# EAGLE board brushless (EAGLE 4.16)
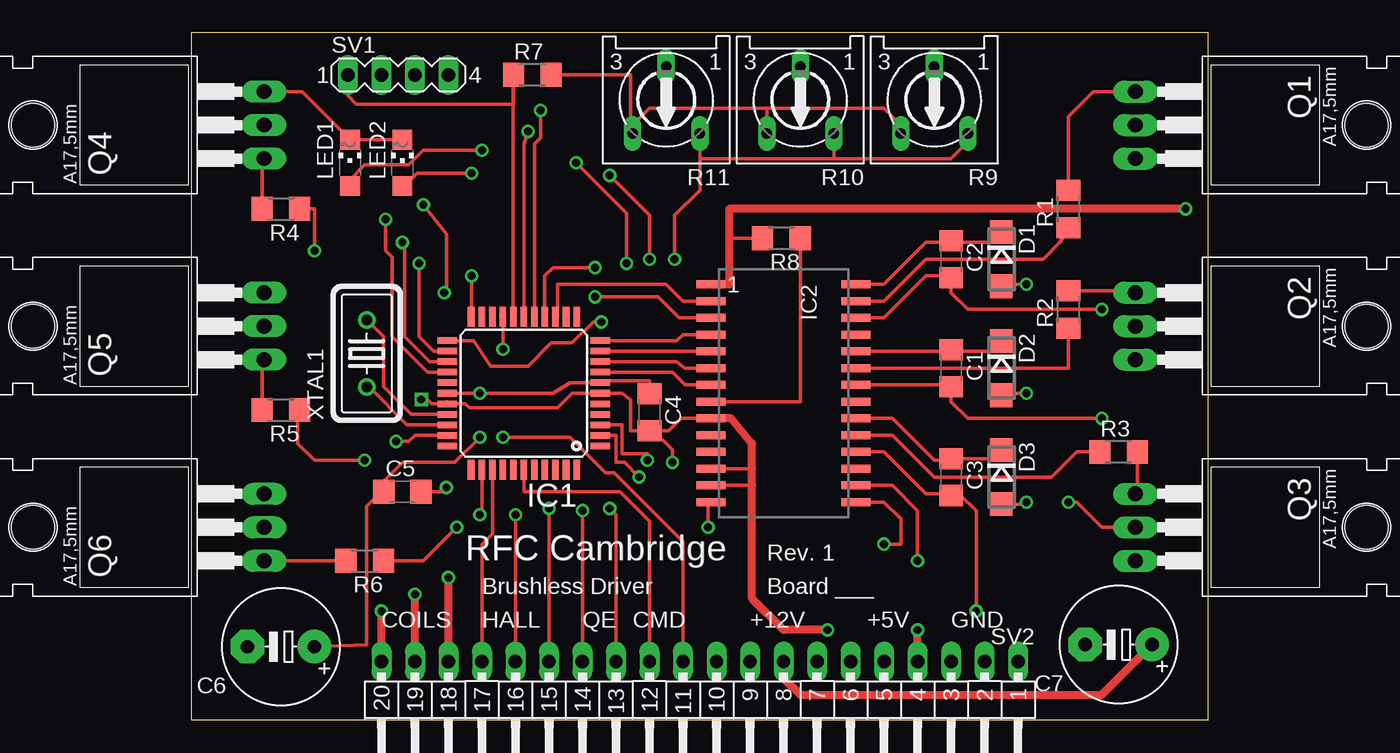
[diagram p0: board, top side]
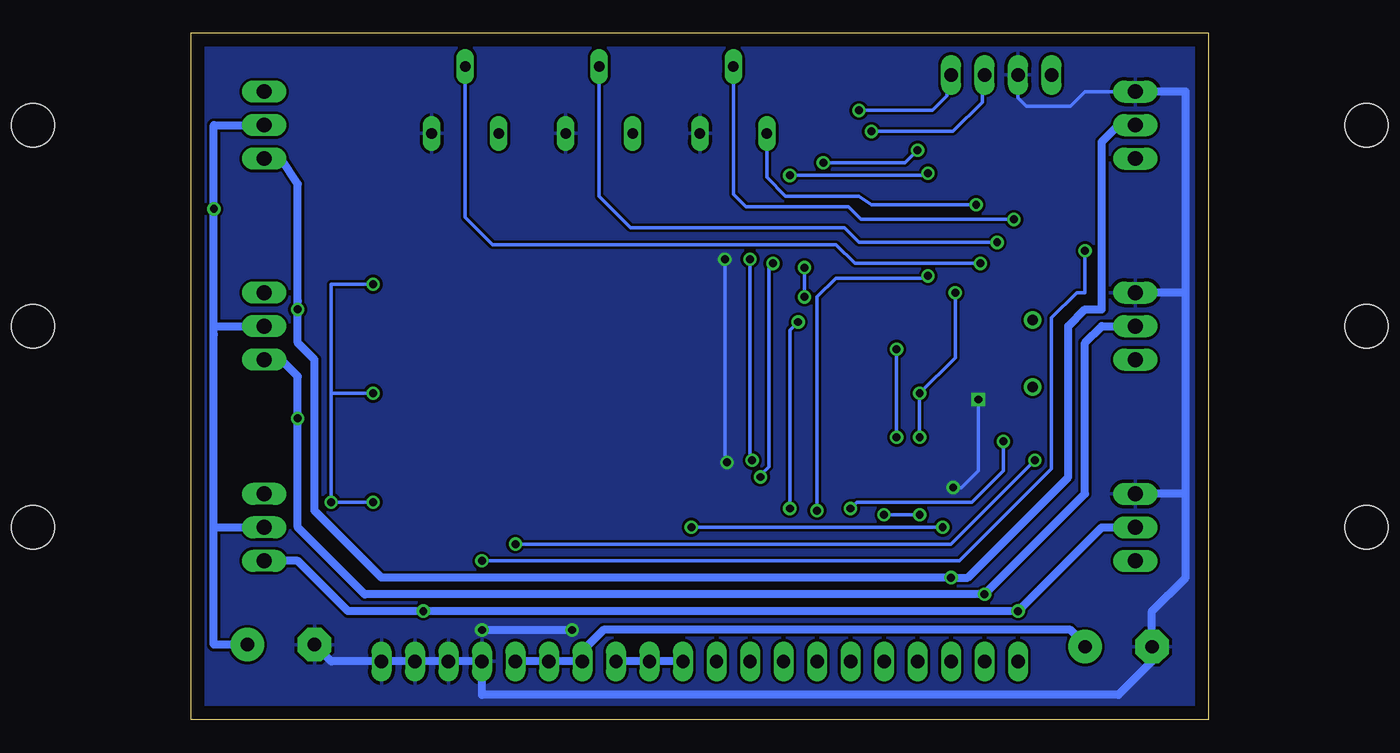
[diagram p1: board, bottom side, seen from below]

Size 77.14 x 52.06 mm. Coordinates in mm from the lower left corner, seen from the top.
Outline: 0,0 77.14,0 77.14,52.06 0,52.06 0,0
Copper layers (1*16): Top 0.035mm / dielectric 1.5mm / Bottom 0.035mm
Design rules "default": minimum track width 10mil, minimum drill 24mil, track to track 8mil, track to pad 8mil, pad to pad 8mil, via to via 8mil, smd to smd 8mil, copper to edge 40mil, drill to drill 8mil, minimum pad ring 10mil, minimum via ring 8mil, stop-mask expansion 4mil, vias tented up to drill 0mil, thermal gap 10mil

## Footprints (pad centres in the part's own frame; a part is rotated, then mirrored left to right if it is on the bottom)
C1206 = smd 1.6 x 1.8: 1 -1.4,0; 2 1.4,0
E5-8,5 = drill 1.016 pad 2.54 round: + -2.54,0 | drill 1.016 pad 2.54 octagon: - 2.54,0
DO214AC = smd 1.8 x 1.7: A 2.05,0; C -2.05,0
TQFP44 = smd 1.5 x 0.5: 1 -5.8,4; 2 -5.8,3.2; 3 -5.8,2.4; 4 -5.8,1.6; 5 -5.8,0.8; 6 -5.8,0; 7 -5.8,-0.8; 8 -5.8,-1.6; 9 -5.8,-2.4; 10 -5.8,-3.2; 11 -5.8,-4; 23 5.8,-4; 24 5.8,-3.2; 25 5.8,-2.4; 26 5.8,-1.6; 27 5.8,-0.8; 28 5.8,0; 29 5.8,0.8; 30 5.8,1.6; 31 5.8,2.4; 32 5.8,3.2; 33 5.8,4 | smd 0.5 x 1.5: 12 -4,-5.8; 13 -3.2,-5.8; 14 -2.4,-5.8; 15 -1.6,-5.8; 16 -0.8,-5.8; 17 0,-5.8; 18 0.8,-5.8; 19 1.6,-5.8; 20 2.4,-5.8; 21 3.2,-5.8; 22 4,-5.8; 34 4,5.8; 35 3.2,5.8; 36 2.4,5.8; 37 1.6,5.8; 38 0.8,5.8; 39 0,5.8; 40 -0.8,5.8; 41 -1.6,5.8; 42 -2.4,5.8; 43 -3.2,5.8; 44 -4,5.8
SOP28 = smd 0.6 x 2.2: 1 -8.255,-5.5; 2 -6.985,-5.5; 3 -5.715,-5.5; 4 -4.445,-5.5; 5 -3.175,-5.5; 6 -1.905,-5.5; 7 -0.635,-5.5; 8 0.635,-5.5; 9 1.905,-5.5; 10 3.175,-5.5; 11 4.445,-5.5; 12 5.715,-5.5; 13 6.985,-5.5; 14 8.255,-5.5; 15 8.255,5.5; 16 6.985,5.5; 17 5.715,5.5; 18 4.445,5.5; 19 3.175,5.5; 20 1.905,5.5; 21 0.635,5.5; 22 -0.635,5.5; 23 -1.905,5.5; 24 -3.175,5.5; 25 -4.445,5.5; 26 -5.715,5.5; 27 -6.985,5.5; 28 -8.255,5.5
CHIPLED_1206 = smd 1.5 x 1.5: A 0,-1.75; C 0,1.75
TO220 = drill 1.118 long: 1 -2.54,-6.35; 2 0,-6.35; 3 2.54,-6.35 | hole 3.302: 0,11.176
R1206 = smd 1.6 x 1.803: 1 -1.422,0; 2 1.422,0
RS3 = drill 0.813 long: A -2.54,2.54; E 2.54,2.54; S 0,-2.54
MA04-1 = drill 1.016 long: 1 -3.81,0; 2 -1.27,0; 3 1.27,0; 4 3.81,0
MA20-1W = drill 1.016 long: 1 -24.13,0; 2 -21.59,0; 3 -19.05,0; 4 -16.51,0; 5 -13.97,0; 6 -11.43,0; 7 -8.89,0; 8 -6.35,0; 9 -3.81,0; 10 -1.27,0; 11 1.27,0; 12 3.81,0; 13 6.35,0; 14 8.89,0; 15 11.43,0; 16 13.97,0; 17 16.51,0; 18 19.05,0; 19 21.59,0; 20 24.13,0
HC18U-V = drill 0.813 round: 1 -2.54,0; 2 2.54,0

## Placement (x,y rotation side)
C1  [C1206]  57.62,26.66 270 top
C2  [C1206]  57.62,34.92 270 top
C3  [C1206]  57.62,18.41 270 top
C4  0.1uF  [C1206]  34.76,23.33 270 top
C5  0.1uF  [C1206]  16.03,17.3 0 top
C6  [E5-8,5]  6.82,5.55 180 top
C7  [E5-8,5]  70.32,5.71 180 top
D1  [DO214AC]  61.43,34.92 270 top
D2  [DO214AC]  61.43,26.66 270 top
D3  [DO214AC]  61.43,18.41 270 top
IC1  PIC18F4431S  [TQFP44]  25.23,24.76 180 top
IC2  [SOP28]  44.92,24.76 270 top
LED1  [CHIPLED_1206]  12.06,42.22 0 top
LED2  [CHIPLED_1206]  16.03,42.22 0 top
Q1  IRF510  [TO220]  77.94,45.08 270 top
Q2  IRF510  [TO220]  77.94,29.84 270 top
Q3  IRF510  [TO220]  77.94,14.6 270 top
Q4  IRF510  [TO220]  -0.8,45.08 90 top
Q5  IRF510  [TO220]  -0.8,29.84 90 top
Q6  IRF510  [TO220]  -0.8,14.6 90 top
R1  10  [R1206]  66.51,38.73 90 top
R2  [R1206]  66.51,31.11 90 top
R3  [R1206]  70.32,20.31 0 top
R4  10  [R1206]  6.82,38.73 180 top
R5  10  [R1206]  6.82,23.49 180 top
R6  10  [R1206]  13.17,12.06 180 top
R7  10K  [R1206]  25.87,48.89 0 top
R8  10K  [R1206]  44.76,36.51 180 top
R9  [RS3]  56.35,46.98 180 top
R10  [RS3]  46.19,46.98 180 top
R11  [RS3]  36.03,46.98 180 top
SV1  [MA04-1]  15.71,48.89 0 top
SV2  [MA20-1W]  38.57,4.44 180 top
XTAL1  40MHz  [HC18U-V]  13.33,27.78 90 top

## Library data of the parts
C1-C7 R1-R8 = rcl
D1-D3 = diode
IC1 = microchip
IC2 Q1-Q6 = transistor-fet
LED1 LED2 = led
R9-R11 = pot
SV1 SV2 = con-lstb
XTAL1 = crystal

## Nets
+5V: C4.1 C5.1 C6.+ IC1.7 IC1.28 R7.2 R9.E R10.E R11.E SV2.5 SV2.6 SV2.7
+12V: C7.+ D1.A D2.A D3.A IC2.1 Q1.2 Q2.2 Q3.2 R8.2 SV2.8 SV2.9 SV2.10
DIR: IC1.39 SV2.12
GND: C4.2 C5.2 C6.- C7.- IC1.6 IC1.29 IC2.9 IC2.12 IC2.13 LED1.C LED2.C Q4.3 Q5.3 Q6.3 R9.A R10.A R11.A SV1.2 SV2.1 SV2.2 SV2.3 SV2.4
H1: IC1.14 IC2.2
H2: IC1.15 IC2.3
H3: IC1.11 IC2.4
HALL1: IC1.32 SV2.15
HALL2: IC1.35 SV2.16
HALL3: IC1.36 SV2.17
KD: IC1.26 R11.S
KI: IC1.25 R10.S
KP: IC1.24 R9.S
L1: IC1.10 IC2.5
L2: IC1.9 IC2.6
L3: IC1.8 IC2.7
N$1: IC2.27 R1.1
N$2: IC1.2 LED1.A
N$3: IC1.3 LED2.A
N$4: C2.1 D1.C IC2.28
N$5: C1.1 D2.C IC2.24
N$7: C3.1 D3.C IC2.20
N$9: IC1.18 R7.1 SV1.1
N$10: Q1.1 R1.2
N$12: IC2.16 R4.1
N$13: Q4.1 R4.2
N$14: IC2.15 R5.1
N$15: IC2.14 R6.1
N$16: Q5.1 R5.2
N$17: Q6.1 R6.2
N$18: IC2.23 R2.1
N$19: Q2.1 R2.2
N$20: Q3.1 R3.2
N$21: IC2.19 R3.1
N$22: IC1.17 SV1.3
N$23: IC1.16 SV1.4
N$31: IC2.8 R8.1
OSC1: IC1.30 XTAL1.2
OSC2: IC1.31 XTAL1.1
PH1: C2.2 IC2.26 Q1.3 Q4.2 SV2.18
PH2: C1.2 IC2.22 Q2.3 Q5.2 SV2.19
PH3: C3.2 IC2.18 Q3.3 Q6.2 SV2.20
QEA: IC1.22 SV2.14
QEB: IC1.23 SV2.13
RX: IC1.1
SPEED: IC1.19 SV2.11
TX: IC1.44

## Tracks (layer width: path | path; a pad name or v marks a point on that pad's centre or on a via)
+5V  (via drill 0.6)
  Top 0.254: 43.65,46.35 34.76,46.35 33.49,45.08 R11.E 33.65,44.45 33.33,44.76 33.33,48.89 R7.2 | 43.65,46.35 R10.E | R9.E 53.81,45.08 52.54,46.35 43.65,46.35 | C4.1 34.76,25.71 31.19,25.71 IC1.7 30.8,25.56 30.79,25.55 28.73,25.55 27.46,24.76 v21.9,24.76 20.95,24.76 19.36,24.76 | 19.36,24.76 19.2,24.76 | 14.63,17.43 14.6,17.46 13.33,16.19 13.33,5.71 C6.+ | 14.63,17.43 C5.1 | 14.63,17.43 14.63,18.12 16.03,19.52 20,19.52 v21.9,21.43 | 19.36,24.76 IC1.28 | v17.61,39.05 19.36,36.83 19.36,34.13 19.36,32.54 v19.2,32.38
  Bottom 0.254: v21.9,21.43 v21.9,24.76 | R11.E 33.49,41.11 32.06,39.68 26.82,39.68 26.5,39.68 25.55,39.05 v17.61,39.05 | v19.2,32.38 19.2,27.46 v21.9,24.76 | v21.9,24.76
  Bottom 0.61: SV2.5 SV2.6 SV2.7 47.46,5.23 45.87,6.82 10.47,6.82 10,6.34 9.2,5.55 | 9.36,6.03 9.2,5.55 | C6.+ 9.2,5.55 | 9.04,5.55 9.2,5.55
+12V  (via drill 0.6)
  Top 0.254: D3.A 63.19,16.36 v63.34,16.5 | D2.A 61.43,24.76 v63.34,24.76 | D1.A 61.43,33.02 v63.34,33.02 | v66.51,16.5 67.14,16.5 69.05,14.6 Q3.2 | 40.79,36.51 R8.2
  Top 0.61: SV2.8 44.92,3.17 46.19,1.9 69.05,1.9 C7.+ | IC2.1 40.79,33.02 40.79,36.51 40.79,38.73 v75.4,38.73
  Bottom 0.254: v63.34,16.5 v66.51,16.5 66.51,24.76 | 66.51,24.76 v63.34,24.76 | 66.51,24.76 66.51,33.02 v63.34,33.02
  Bottom 0.61: SV2.8 SV2.9 SV2.10 | C7.+ 75.4,5.71 75.4,14.6 | 75.4,14.6 Q3.2 | 75.4,14.6 75.4,29.2 | 75.4,29.2 75.4,29.84 Q2.2 | Q1.2 75.4,45.08 v75.4,38.73 75.4,29.2
DIR
  Top 0.254: SV2.12 34.76,13.17 | 34.76,13.17 34.76,13.33 | IC1.39 25.23,17.3 32.54,17.3 34.76,15.08 34.76,13.17
GND  (via drill 0.6)
  Top 0.254: 38.57,42.54 R11.A | 38.57,42.54 48.73,42.54 | 48.73,42.54 R10.A | R9.A 58.89,43.81 57.62,42.54 48.73,42.54 | C4.2 34.73,21.9 33.33,21.9 33.33,24.28 32.7,24.76 IC1.6 28.89,24.76 27.77,23.65 21.11,23.65 20.79,23.97 19.52,23.97 19.43,24.05 | C4.2 34.79,21.9 35.08,21.9 | 35.08,21.9 36.19,21.9 37.14,22.86 IC2.9 | 42.54,17.77 | 42.54,17.77 IC2.13 | 42.54,19.04 IC2.12 | 19.43,24.05 19.36,24.12 | 19.43,24.05 IC1.29 19.43,23.89 | C5.2 19.04,17.3 v19.36,17.62 | v17.46,24.28 17.61,24.6 18.25,23.97 19.36,23.97 19.43,23.89 | 19.43,23.89 19.52,23.81 | 38.57,42.54 38.57,40.16 36.66,38.25 v36.66,34.92 | 35.08,21.9 35.05,21.93 C4.2 | v36.51,19.52 36.51,20.47 35.08,21.9 | LED1.C 11.9,43.97 | LED1.C 8.41,47.62 Q4.3 | LED2.C LED1.C
  Top 0.61: IC2.9 40.95,22.86 42.54,20.95 42.54,19.04 42.54,17.77 42.54,9.2 44.92,6.82 v48.25,6.82 | SV2.4 v55.08,6.82
  Bottom 0.254: Q4.3 9.36,47.62 10.47,46.51 13.81,46.51 14.44,47.14 SV1.2 | SV1.2 | SV1.2 14.28,49.05 | v19.36,17.62 18.73,17.62 17.46,18.89 v17.46,24.28 | v36.66,34.92 36.66,19.68 v36.51,19.52
  Bottom 0.61: C7.- 66.51,4.44 SV2.1 SV2.2 SV2.3 SV2.4 55.08,1.9 6.82,1.9 4.28,4.44 C6.- 4.28,8.25 1.74,10.79 1.74,17.14 | 1.74,17.14 Q6.3 | Q5.3 1.74,32.38 1.74,31.11 | 1.74,17.14 1.74,31.11 | Q4.3 1.74,47.62 1.74,31.11 | v55.08,6.82 v48.25,6.82
  pour Bottom: -8.42,-4.45 84.29,-4.45 84.29,53.97 -8.42,53.97
H1
  Top 0.254: IC2.2 37.3,31.74 36.03,33.02 27.77,33.02 27.77,30.47 27.72,30.47 IC1.14
H2  (via drill 0.6)
  Top 0.254: IC1.15 26.82,30.57 26.82,33.65 27.46,34.29 v30.63,34.29 | v30.63,32.06 35.39,32.06 36.98,30.47 IC2.3 39.52,30.47
  Bottom 0.254: v30.63,34.29 v30.63,32.06
H3
  Top 0.254: IC2.4 37.3,29.2 36.82,28.73 31,28.73 | 30.95,28.73 31,28.73 | 31,28.73 IC1.11
HALL1  (via drill 0.6)
  Top 0.254: SV2.15 v27.14,16.03 | v15.55,21.11 16.5,21.11 16.98,21.58 19.52,21.58 19.49,21.56 IC1.32
  Bottom 0.254: v27.14,16.03 26.66,16.5 17.93,16.5 15.55,18.89 v15.55,21.11
HALL2  (via drill 0.6)
  Top 0.254: SV2.16 v24.6,15.55 | IC1.35 22.06,18.93 22.06,15.87 v21.9,15.55
  Bottom 0.254: v24.6,15.55 24.44,15.55 v21.9,15.55
HALL3
  Top 0.254: SV2.17 22.06,13.33 22.85,14.12 22.85,18.94 IC1.36
KD  (via drill 0.6)
  Top 0.254: IC1.26 17.92,26.36 15.23,29.05 15.23,35.08 14.76,35.55 v14.76,37.94
  Bottom 0.254: v14.76,37.94 26.35,37.94 27.3,38.89 35.08,38.89 36.03,39.84 36.03,49.37 36.19,49.53 R11.S
KI  (via drill 0.6)
  Top 0.254: IC1.25 18.07,27.16 16.19,29.05 16.19,36.03 v16.03,36.19
  Bottom 0.254: v16.03,36.19 26.5,36.19 27.62,37.3 43.81,37.3 46.19,39.68 R10.S
KP  (via drill 0.6)
  Top 0.254: IC1.24 18.38,27.96 17.3,29.05 v17.3,34.6
  Bottom 0.254: v17.3,34.6 26.82,34.6 28.25,36.03 54.29,36.03 56.35,38.1 R9.S
L1
  Top 0.254: IC1.10 31.06,27.93 IC2.5
L2
  Top 0.254: IC1.9 31.17,27.14 36.82,27.14 37.46,26.66 IC2.6
L3
  Top 0.254: IC1.8 31.05,26.35 36.51,26.35 37.46,25.39 IC2.7
N$1
  Top 0.254: R1.1 65.88,36.19 64.61,34.92 55.71,34.92 52.54,31.74 IC2.27
N$2  (via drill 0.6 pad 0.25)
  Top 0.254: IC1.2 32.22,21.56 32.22,19.52 32.85,19.52 v33.97,18.41 | v33.01,34.6 33.01,38.41 v29.2,42.22 | v22.06,43.18 17.61,43.18 16.5,42.06 13.17,42.06 12.06,40.95 LED1.A
  Bottom 0.254: v33.97,18.41 33.97,18.57 33.33,19.2 33.33,34.29 v33.01,34.6 | v29.2,42.22 23.01,42.22 v22.06,43.18
N$3  (via drill 0.6 pad 0.25)
  Top 0.254: IC1.3 32.7,22.36 32.7,20.16 34.6,20.16 v34.6,19.68 | v34.76,34.92 34.76,38.25 v31.74,41.27 | LED2.A 16.03,40.32 17.14,41.43 v21.27,41.43
  Bottom 0.254: v34.6,19.68 34.76,19.68 v34.76,34.92 | v31.74,41.27 21.42,41.27 v21.27,41.43
N$4
  Top 0.254: IC2.28 52.54,33.02 55.71,36.19 57.62,36.19 | 57.62,36.19 C2.1 | 61.43,36.19 D1.C | 57.62,36.19 61.43,36.19 | 62.06,36.19 61.43,36.19
N$5
  Top 0.254: 57.62,27.93 C1.1 | IC2.24 57.62,27.93 | D2.C 62.06,27.93 57.62,27.93
N$7
  Top 0.254: IC2.20 53.17,22.86 56.35,19.68 57.62,19.68 C3.1 60.92,19.81 61.43,20.31 D3.C
N$9
  Top 0.254: IC1.18 24.43,48.74 24.28,48.89 R7.1 24.45,46.67 24.44,46.67 12.54,46.67 11.9,47.3 SV1.1 11.9,49.05
N$10
  Top 0.254: 71.44,47.77 Q1.1 68.41,47.62 66.51,45.72 R1.2
N$12  (via drill 0.6)
  Top 0.254: IC2.16 53.17,17.77 55.08,15.87 v55.08,12.06 | v9.36,35.55 9.36,38.73 R4.1 8.09,38.73
  Bottom 0.254: v55.08,12.06 18.88,12.06 11.9,19.04 11.9,30.47 10,32.38 9.36,32.38 v9.36,35.55
N$13
  Top 0.254: R4.2 5.4,42.39 Q4.1
N$14  (via drill 0.6)
  Top 0.254: IC2.15 52.54,16.5 53.81,15.24 53.81,13.33 v52.54,13.33 | v13.17,19.68 9.36,19.68 8.09,20.95 8.09,23.49 R5.1
  Bottom 0.254: v52.54,13.33 19.52,13.33 v13.17,19.68
N$15  (via drill 0.6)
  Top 0.254: R6.1 17.61,12.06 v20.15,14.6 | IC2.14 39.2,16.5 v39.2,14.6
  Bottom 0.254: v20.15,14.6 v39.2,14.6
N$16
  Top 0.254: R5.2 5.4,27.15 Q5.1
N$17
  Top 0.254: 11.9,12.06 R6.2 Q6.1
N$18
  Top 0.254: 66.51,29.84 R2.1 66.51,26.66 IC2.23
N$19
  Top 0.254: R2.2 71.59,32.53 Q2.1
N$20
  Top 0.254: R3.2 71.74,17.29 Q3.1
N$21
  Top 0.254: IC2.19 53.17,21.58 56.35,18.41 65.24,18.41 67.14,20.31 R3.1
N$22  (via drill 0.6 pad 0.25)
  Top 0.254: IC1.17 25.23,43.65 v25.55,44.6
  Bottom 0.254: v25.55,44.6 19.36,44.6 17.14,46.83 17.14,48.73 SV1.3
N$23  (via drill 0.6 pad 0.25)
  Top 0.254: IC1.16 26.03,43.65 26.35,43.96 26.51,44.12 v26.5,46.19
  Bottom 0.254: v26.5,46.19 20.95,46.19 19.84,47.3 19.84,48.57 SV1.4
N$31
  Top 0.254: R8.1 46.19,24.12 IC2.8 39.36,24.12
OSC1
  Top 0.254: IC1.30 16.67,23.16 14.6,25.24 14.6,29.05 XTAL1.2 | XTAL1.2
OSC2
  Top 0.254: XTAL1.1 13.49,25.24 16.36,22.36 IC1.31
PH1  (via drill 0.6)
  Top 0.254: IC2.26 52.54,30.47 55.71,33.65 57.62,33.65 C2.2 57.62,32.38 58.89,31.11 v69.05,31.11
  Top 0.61: SV2.18 v19.52,10.79
  Bottom 0.61: Q4.2 6.82,45.08 8.09,43.81 8.09,31.11 9.36,31.11 10.63,29.84 10.63,18.41 18.25,10.79 v19.52,10.79 62.7,10.79 67.78,15.87 67.78,27.3 69.05,28.57 v69.05,31.11 69.05,31.74 69.05,40.64 70.32,42.54 Q1.3
PH2  (via drill 0.6)
  Top 0.254: IC2.22 57.62,25.39 C1.2 57.62,24.12 58.89,22.86 v69.05,22.86
  Top 0.61: SV2.19 v16.98,9.52
  Bottom 0.61: Q5.2 8.09,29.84 9.36,28.57 9.36,17.14 v16.98,9.52 63.97,9.52 69.05,14.6 v69.05,22.86 69.05,26.03 70.32,27.3 Q2.3
PH3  (via drill 0.6)
  Top 0.254: IC2.18 52.54,20.31 55.71,17.14 57.62,17.14 C3.2 58.38,17.01 59.52,15.87 v59.52,8.25
  Top 0.61: SV2.20 v14.44,8.25
  Bottom 0.61: Q3.3 69.05,12.06 65.24,8.25 v59.52,8.25 v14.44,8.25 8.09,14.6 Q6.2
QEA  (via drill 0.6)
  Top 0.254: SV2.14 v29.68,15.87 | 21.11,30.16 21.23,30.29 | 21.23,30.29 IC1.22 | v21.27,33.65 21.27,30.32 21.23,30.29
  Bottom 0.254: v29.68,15.87 29.68,32.06 28.25,33.49 21.42,33.49 v21.27,33.65
QEB  (via drill 0.6)
  Top 0.254: SV2.13 32.22,15.55 v31.74,16.03 | v31.11,30.16 30.47,30.16 28.89,28.57 27.3,28.57 25.55,26.82 22.7,26.82 21.42,28.73 19.2,28.73 19.23,28.76 IC1.23
  Bottom 0.254: v31.74,16.03 31.74,29.52 v31.11,30.16
SPEED  (via drill 0.6)
  Top 0.254: SV2.11 37.3,13.49 32.06,18.73 31.43,18.73 28.73,21.43 v23.65,21.43 | 23.49,30.63 23.56,30.56 | 23.56,30.56 IC1.19 | v23.65,28.09 23.65,30.47 23.56,30.56
  Bottom 0.254: v23.65,21.43 v23.65,28.09

## Text on the board
tPlace: RFC Cambridge | Rev. 1 | Brushless Driver | Board ___ | COILS | HALL | QE | CMD | +12V | +5V | GND